# Altium PCB PCB2.PcbDoc
Units mm, origin at the board's own origin, x right, y up, seen from the top; angles counter-clockwise.
Board outline 124.87 x 54.51 mm, 2 copper layers (Top Layer, Bottom Layer); 28 components, 32 nets, 138 pads, 2 vias.
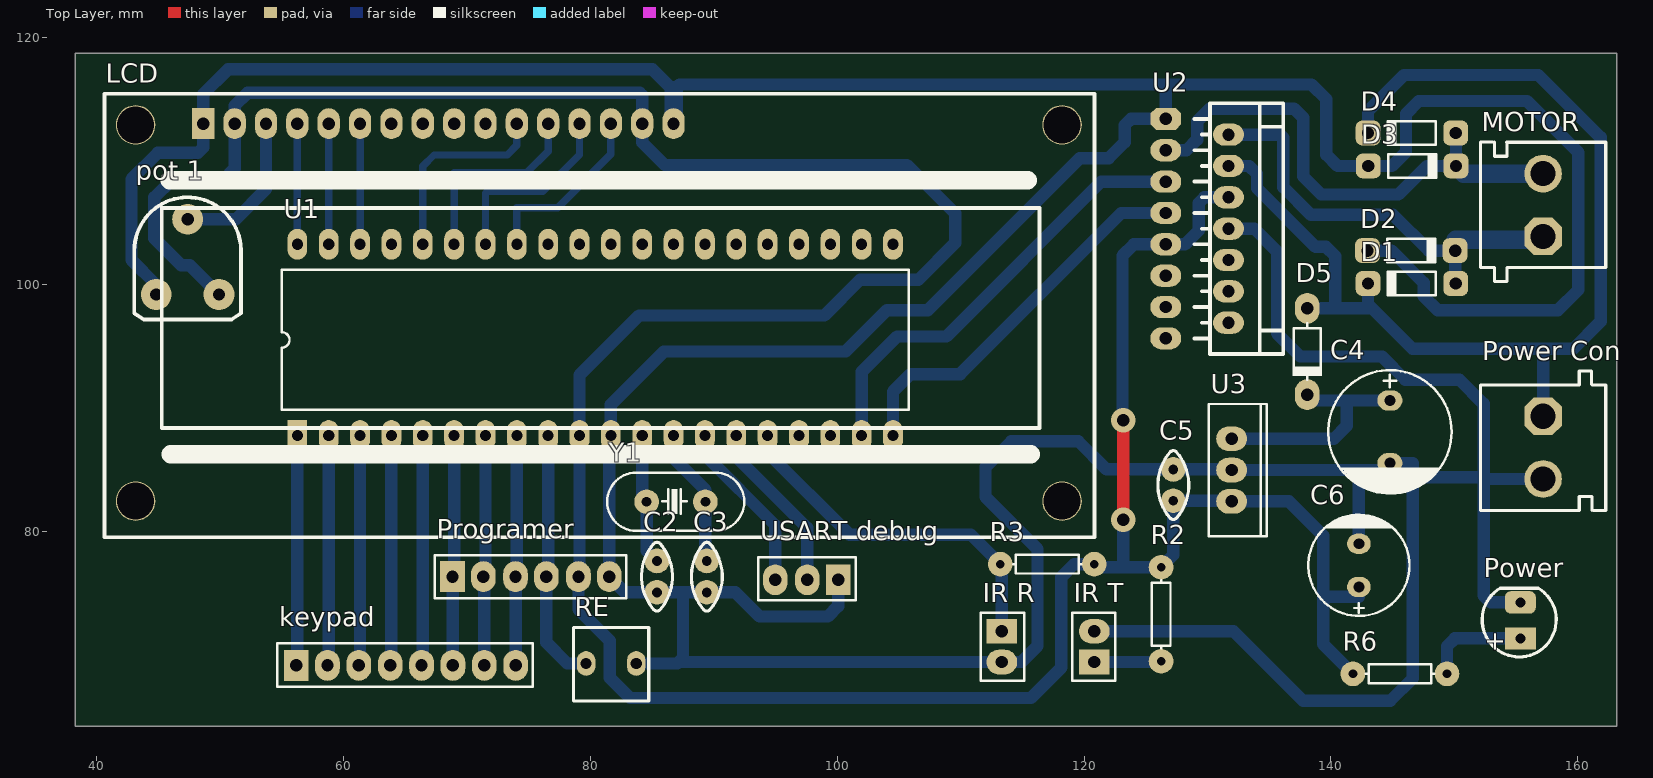
[diagram p0: Top Layer view]
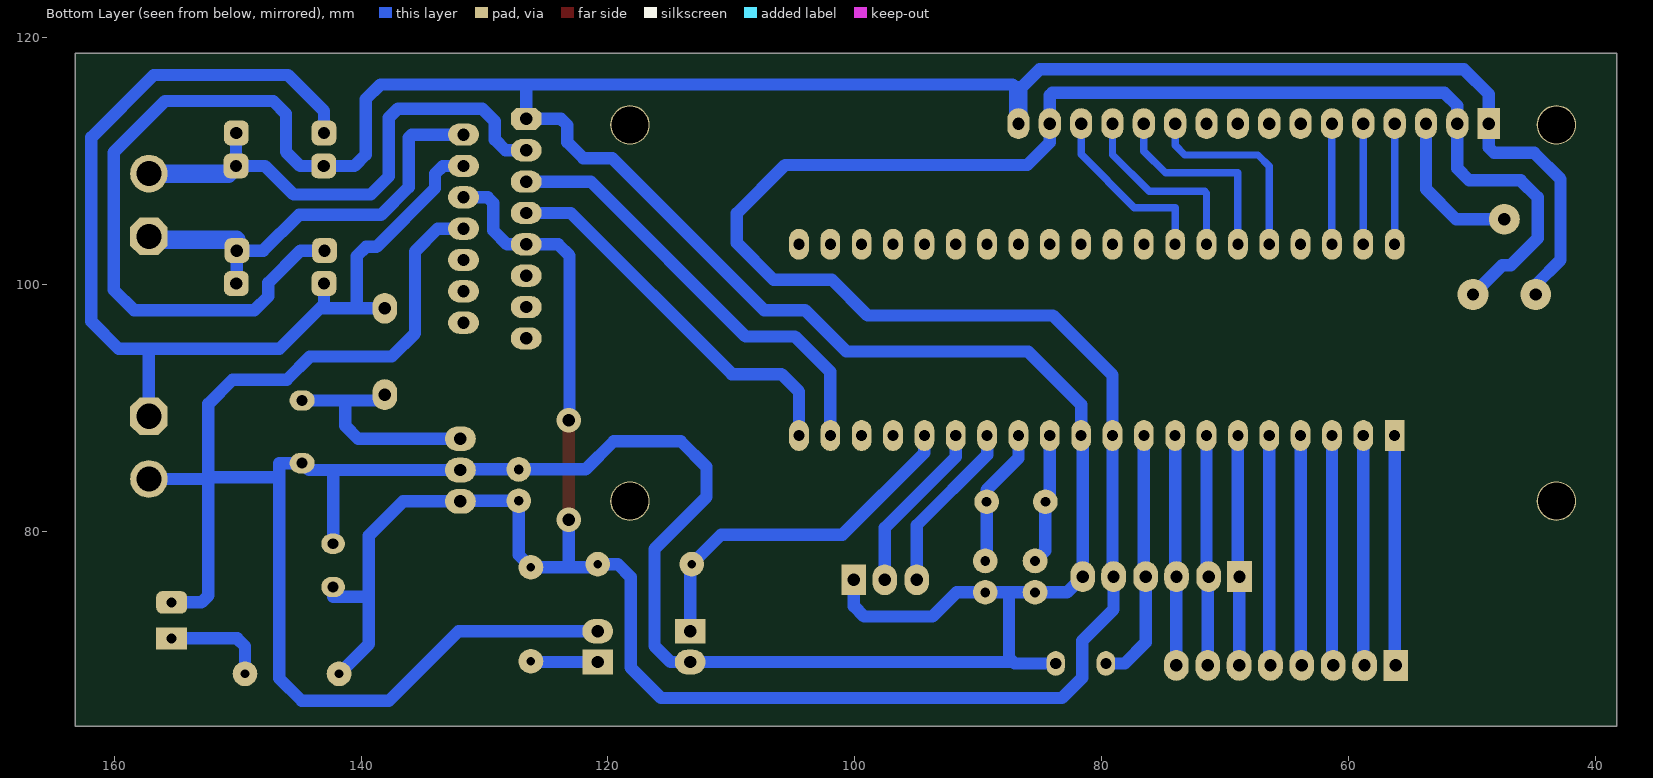
[diagram p1: Bottom Layer view, seen from below]

## Layer stack, top to bottom
Top Solder: solder mask 0.0102, Solder Resist, Dk 3.5
Top Layer: signal copper 0.0356
Dielectric 1: dielectric 0.32, FR-4, Dk 4.8
Bottom Layer: signal copper 0.0356
Bottom Solder: solder mask 0.0102, Solder Resist, Dk 3.5

## Board outline
38.278,64.211 163.144,64.211 163.144,118.72 38.278,118.72

## Design rules (kind name [scope] priority, off if disabled: settings)
Clearance [All] p1: gap=0.254
PolygonConnect [All] p1: connectstyle=Relief reliefconductorwidth=0.254 reliefentries=4 polygonreliefangle="90 Angle" airgapwidth=0.254
RoutingVias [All] p1: holewidth=1 width=2 viastyle="Through Hole" minholewidth=1 minwidth=2 maxholewidth=1 maxwidth=2
SolderMaskExpansion [All] p1: expansion=0.102
Width [All] p1: maxlimit=5 minlimit=0.6 preferedwidth=0.8
29 further rules are at their usual default settings.

## Components (designator, comment, footprint, x,y, rotation, side; value= is the part's Value field where it differs from the comment)
C2 "22PF" "Cap - 100nF" 85.395,76.327 r270 top
C3 "22PF" "Cap - 100nF" 89.433,76.327 r270 top
C4 "2200uF" "cap 04" 144.78,88.062 r90 top
C5 "100nF" "Cap - 100nF" 127.229,83.744 r90 top
C6 "470uF" "cap 03" 142.265,77.241 r270 top
D1 "1N4148" DO-35 146.558,100.076 r180 top
D2 "1N4148" DO-35 146.507,102.743 r0 top
D3 "1N4148" DO-35 146.583,109.601 r0 top
D4 "1N4148" DO-35 146.558,112.268 r180 top
D5 "?" Diode-1 138.074,98.069 r270 top
"IR R" "Pin Header" SIP2 113.335,71.907 r90 top
"IR T" "Pin Header" SIP2 120.828,69.407 r270 top
keypad "Pin Header" SIP8 56.159,69.139 r180 top
LCD "LCD 16*2" LCD2-16 48.641,113.03 r0 top
MOTOR "CON2 pin blue" My_CN2 152.095,101.371 r90 top
"pot 1" "5k" POT_1 44.831,99.187 r0 top
Power "LED 5mm" LED-1 155.346,72.72 r180 top
"Power Con" "CON2 pin blue" My_CN2 162.281,91.846 r270 top
Programer "Pin Header" SIP6 68.834,76.327 r180 top
R2 "330" AXIAL-0.3 126.238,77.089 r270 top
R3 "4.7K" AXIAL-0.3 120.828,77.343 r180 top
R6 "330" AXIAL-0.3 141.783,68.453 r0 top
RE "PB-2pin" PB-2pin 78.638,66.243 r0 top
U1 "ATmega16_PDIP" DIP40 56.261,87.757 r0 top
U2 "L298" L298 126.619,113.411 r270 top
U3 "7805" TO-220 131.953,84.963 r270 top
"USART debug" "Pin Header" SIP3 100.076,76.073 r0 top
Y1 "8mhz" XTAL 84.557,82.398 r0 top

## Footprints (in the part's own frame and the unit in brackets; to place one, negate y for a bottom-side part, rotate by r counter-clockwise, add the part's x,y. Pads: shape width x height; smd on the part's side, far side on the other; paste and mask are expansions set on the pad)
AXIAL-0.3 [mm]
  round 2 hole 0.7: 1(0,0) 2(7.62,0)
  silkscreen extent 1.04,-0.76 6.58,0.76
"cap 03" [mil]
  oval 65x75 hole 35: 1(68.9,0) 2(-68.9,0)
  silkscreen extent -161,-161 161,161, body extent -159,-159 157,158, height 473
"cap 04" [mil]
  oval 65x80 hole 35: 1(100,0) 2(-100,0)
  silkscreen extent -197,-197 197,197, body extent -198,-197 198,199, height 513
"Cap - 100nF" [mm]
  round 2 hole 0.8: 1(-1.27,0) 2(1.27,0)
  silkscreen extent -2.78,-1.25 2.79,1.25, body extent -2.92,-0.86 2.92,0.83, height 6.92
Diode-1 [mm]
  oval 2.5x2 hole 1 unplated: 1(0,0) 2(7,0)
  silkscreen extent 1.2,-1.2 5.8,1.2
DIP40 [mm]
  rect 1.6x2.5 hole 0.9: 1(0,0)
  oval 1.6x2.5 hole 0.9: 2(2.54,0) 3(5.08,0) 4(7.62,0) 5(10.16,0) 6(12.7,0) 7(15.24,0) 8(17.78,0) 9(20.32,0) 10(22.86,0) 11(25.4,0) 12(27.94,0) 13(30.48,0) 14(33.02,0) 15(35.56,0) 16(38.1,0) 17(40.64,0) 18(43.18,0) 19(45.72,0) 20(48.26,0) 21(48.26,15.5) 22(45.72,15.5) 23(43.18,15.5) 24(40.64,15.5) 25(38.1,15.5) 26(35.56,15.5) 27(33.02,15.5) 28(30.48,15.5) 29(27.94,15.5) 30(25.4,15.5) 31(22.86,15.5) 32(20.32,15.5) 33(17.78,15.5) 34(15.24,15.5) 35(12.7,15.5) 36(10.16,15.5) 37(7.62,15.5) 38(5.08,15.5) 39(2.54,15.5) 40(0,15.5)
  silkscreen extent -1.27,2.08 49.53,13.41
DO-35 [mm] "Diode, Axial; Body 3.8 x 1.9 mm (LxDia. max), Lead Dia. 0.53 mm (max)"
  rrect50% 2x2 hole 1: 1(-3.55,0) 2(3.55,0)
  silkscreen extent -1.95,-0.95 2.05,0.95, body extent -3.82,-0.87 3.82,0.87, height 1.89
L298 [mm]
  oct 1.8x2.5 hole 1: 1(0,0)
  oval 1.8x2.5 hole 1: 2(1.27,5.08) 3(2.54,0) 4(3.81,5.08) 5(5.08,0) 6(6.35,5.08) 7(7.62,0) 8(8.89,5.08) 9(10.16,0) 10(11.43,5.08) 11(12.7,0) 12(13.97,5.08) 13(15.24,0) 14(16.51,5.08) 15(17.78,0)
  silkscreen extent -1.27,2.31 19.05,9.53
LCD2-16 [mm]
  rect 1.8x2.5 hole 1: 1(0,0)
  oval 1.8x2.5 hole 1: 2(2.54,0) 3(5.08,0) 4(7.62,0) 5(10.16,0) 6(12.7,0) 7(15.24,0) 8(17.78,0) 9(20.32,0) 10(22.86,0) 11(25.4,0) 12(27.94,0) 13(30.48,0) 14(33.02,0) 15(35.56,0) 16(38.1,0)
  round 3.2 hole 3: ""(-5.486,-30.582) ""(-5.486,-0.102) ""(69.571,-30.582) ""(69.571,-0.102)
  silkscreen extent -8,-33.5 72.21,2.41
LED-1 [mm] "LED; 2 Leads"
  rect 2.5x1.8 hole 0.8: 1(0,1.397)
  rrect50% 2.5x1.8 hole 0.8: 2(0,-1.524)
  silkscreen extent -2.91,-2.67 3.09,2.9
My_CN2 [mil]
  oct 120x120 hole 80: 1(99.5,-200.5)
  round 120 hole 80: 2(299.5,-200.5)
  silkscreen extent -45,-400 400,0
PB-2pin [mm] "Switch"
  oval 1.5x2 hole 0.9: 1(1.016,3.048) 2(5.08,3.048)
  silkscreen extent 0,0 6.1,5.97
POT_1 [mm]
  round 2.5 hole 1: 1(0,0) 2(2.54,6.096) 3(5.08,0)
  silkscreen extent -1.78,-2.03 6.86,7.87
SIP2 [mm]
  rect 2x2.5 hole 1: 1(0,0)
  oval 2x2.5 hole 1: 2(-2.5,0)
  silkscreen extent -4,-1.8 1.5,1.7
SIP3 [mm]
  rect 2x2.5 hole 1: 1(0,0)
  oval 2x2.5 hole 1: 2(-2.5,0) 3(-5.1,0)
  silkscreen extent -6.47,-1.66 1.43,1.84
SIP6 [mm]
  rect 2x2.5 hole 1: 1(0,0)
  oval 2x2.5 hole 1: 2(-2.5,0) 3(-5.1,0) 4(-7.6,0) 5(-10.2,0) 6(-12.7,0)
  silkscreen extent -14.06,-1.73 1.45,1.77
SIP8 [mm]
  rect 2x2.5 hole 1: 1(0,0)
  oval 2x2.5 hole 1: 2(-2.541,0) 3(-5.082,0) 4(-7.623,0) 5(-10.164,0) 6(-12.705,0) 7(-15.246,0) 8(-17.787,0)
  silkscreen extent -19.19,-1.78 1.53,1.72
TO-220 [mm]
  oval 2x2.5 hole 1 unplated: 1(-2.54,0) 2(0,0) 3(2.54,0)
  silkscreen extent -5.35,-1.85 5.35,2.85
XTAL [mm]
  round 2 hole 0.8: 1(0,0) 2(4.76,0)
  silkscreen extent -3.19,-2.36 7.91,2.36, body extent -3.32,-2.38 8.03,2.42, height 13.06

## Part data
C2 C3 C5: library part Cap-Bipolar, "Bipolar Capacitor"
C4 C6: library part Cap-Polar, "Polar Capacitor"
D1 D2 D3 D4: library part "Diode 1N4148", "High Conductance Fast Diode"
D5: library part Diode, "Diode"
"IR R" "IR T": library part CON2
keypad: library part CON8
LCD: library part LCD-CH
MOTOR "Power Con": "Connector blue screw"
"pot 1": library part POT
Power: "Typical LED"
Programer: library part CON6
R2 R3 R6: library part Res, "Resistor"
RE: "Switch"
U1: "8-Bit AVR Microcontroller"
U3: "Reglator"
"USART debug": library part CON3
Y1: library part XTAL, "XTAL Crystal"

## Via types
v1: diameter 2, hole 1, Top Layer to Bottom Layer, 2 vias

## Nets (pads, with @x,y where several pads share a name; then routed paths per layer and width w, separated by ;. In a path a pad name is that pad's centre, name@x,y a point inside that pad or via, vN(x,y) a via of type N, cw(c..) or ccw(c..) an arc to the next point about the centre after c; other vN are vias at no path point)
FB: "IR R.1" R3.2 U1.16 | length 29.5
  Bottom Layer w1: U1.16 94.361,86.36 100.99,79.731 110.82,79.731 R3.2 113.335,77.216 113.335,71.907
GND: "IR R.2" "IR T.2" "pot 1.1" "Power Con.2" "USART debug.1" C2.2 C3.2 C4.2 C5.2 C6.2 D2.1 D3.1 LCD.1 LCD.16 Power.2 Programer.6 RE.2 U1.11 U2.1 U2.8 U3.2 | length 477.1
  Bottom Layer w1: 44.831,99.187 44.831,99.974 42.824,101.981 42.824,108.534 44.958,110.668 48.209,110.668 48.641,111.1 LCD.1 48.641,115.418 50.648,117.424 85.039,117.424 86.741,115.722 87.224,116.205 138.43,116.205 139.624,115.011 139.624,110.515 140.538,109.601 D3.1 144.932,109.601 146.075,110.744 146.075,113.817 147.117,114.859 155.88,114.859 160.045,110.693 160.045,99.568 158.394,97.917 148.641,97.917 147.523,99.035 147.523,100.127 144.907,102.743 D2.1 ; RE.2 87.046,69.291 87.162,69.407 ; 100.076,76.073 100.076,73.939 99.238,73.101 93.701,73.101 91.745,75.057 C3.2 87.503,75.057 ; 120.828,71.907 132.105,71.907 137.744,66.269 144.805,66.269 146.634,68.097 146.634,84.252 ; 126.949,116.205 126.619,115.875 U2.1 123.8,113.411 123.292,112.903 123.292,111.531 121.996,110.236 119.659,110.236 107.34,97.917 104.038,97.917 100.686,94.564 85.954,94.564 81.661,90.272 U1.11 81.534,87.63 Programer.6 82.804,75.057 C2.2 87.503,75.057 ; U2.8 133.782,104.521 135.636,102.667 135.636,96.037 137.516,94.158 144.145,94.158 146.025,92.278 150.419,92.278 152.375,90.322 152.375,84.391 ; U3.2@131.813,85.014 C5.2 121.818,85.014 119.532,87.3 114.097,87.3 112.014,85.217 112.014,82.779 116.23,78.562 116.23,70.714 114.924,69.407 113.335,69.407 87.162,69.407 ; U3.2 144.221,84.963 C4.2 146.634,85.522 146.634,84.252 ; C6.2@142.265,79.781 142.265,84.633 ; Power.2 152.933,74.244 152.375,74.803 152.375,84.391 ; 157.188,84.239 152.527,84.239 152.375,84.391 ; 87.162,69.407 87.503,69.748 87.503,75.057 ; 146.634,84.252 146.774,84.391 152.375,84.391
  Bottom Layer w1.5: LCD.16 86.741,115.722
M1: D1.1 D2.2 MOTOR.1 U2.2 | length 34
  Bottom Layer w1: U2.2 135.89,112.141 136.144,111.887 136.144,107.874 138.379,105.639 145.034,105.639 147.93,102.743 D2.2 D1.1@150.057,100.127
  Bottom Layer w1.5: D2.2@150.108,103.632 MOTOR.1@156.921,103.632
M2: D3.2 D4.1 MOTOR.2 U2.3 | length 42.3
  Bottom Layer w1: U2.3 128.295,110.871 129.159,111.735 129.159,113.208 130.195,114.244 137.013,114.244 137.744,113.513 137.744,108.763 139.217,107.29 145.466,107.29 147.777,109.601 D3.2 ; D4.1@150.133,112.243 D3.2 ; D3.2@150.756,108.979 D3.2
  Bottom Layer w1.5: D3.2@150.756,108.979 MOTOR.2
MISO: keypad.7 Programer.2 U1.7 | length 18.7
  Bottom Layer w1: keypad.7 71.405,76.256 Programer.2 71.501,76.494 U1.7
MOSI: keypad.6 Programer.1 U1.6 | length 18.7
  Bottom Layer w1: keypad.6 68.864,76.297 Programer.1 68.961,76.454 U1.6
NetC2_1: C2.1 U1.12 Y1.1 | length 10.7
  Bottom Layer w1: U1.12 84.201,82.753 Y1.1 84.557,78.435 C2.1
NetC3_1: C3.1 U1.13 Y1.2 | length 11.3
  Bottom Layer w1: U1.13 86.741,85.928 89.317,83.353 Y1.2 89.317,77.714 C3.1
NetC4_1: C4.1 D5.2 U3.1 | length 18.7
  Bottom Layer w1: U3.1 140.233,87.503 141.275,88.544 141.275,90.602 ; D5.2 138.542,90.602 141.275,90.602 ; C4.1 141.275,90.602
"NetIR T_1": "IR T.1" R2.2 | length 5.4
  Bottom Layer w1: 120.828,69.407 126.176,69.407 R2.2
Netkeypad_1: keypad.1 U1.1 | length 18.7
  Bottom Layer w1: keypad.1 56.261,69.24 U1.1
Netkeypad_2: keypad.2 U1.2 | length 18.7
  Bottom Layer w1: keypad.2 58.801,69.239 U1.2
Netkeypad_3: keypad.3 U1.3 | length 18.7
  Bottom Layer w1: keypad.3 61.341,69.238 U1.3
Netkeypad_4: keypad.4 U1.4 | length 18.7
  Bottom Layer w1: keypad.4 63.881,69.237 U1.4
Netkeypad_5: keypad.5 U1.5 | length 18.7
  Bottom Layer w1: keypad.5 66.421,69.236 U1.5
NetLCD_3: "pot 1.2" LCD.3 | length 12.7
  Bottom Layer w1: 47.371,105.283 51.283,105.283 53.721,107.721 LCD.3
NetLCD_4: LCD.4 U1.40 | length 9.8
  Bottom Layer w0.6: U1.40 LCD.4
NetLCD_5: LCD.5 U1.39 | length 9.8
  Bottom Layer w0.6: U1.39 LCD.5
NetLCD_6: LCD.6 U1.38 | length 9.8
  Bottom Layer w0.6: U1.38 LCD.6
NetLCD_11: LCD.11 U1.36 | length 16.4
  Bottom Layer w0.6: U1.36 66.421,109.576 67.335,110.49 73.254,110.49 74.041,111.277 LCD.11
NetLCD_12: LCD.12 U1.35 | length 16.4
  Bottom Layer w0.6: U1.35 68.961,109.042 74.828,109.042 76.581,110.795 LCD.12
NetLCD_13: LCD.13 U1.34 | length 15.6
  Bottom Layer w0.6: U1.34 71.501,107.391 71.653,107.544 76.149,107.544 79.121,110.515 LCD.13
NetLCD_14: LCD.14 U1.33 | length 14.9
  Bottom Layer w0.6: U1.33 74.041,106.223 77.343,106.223 81.661,110.541 LCD.14
NetPower_1: Power.1 R6.2 | length 8.4
  Bottom Layer w1: R6.2 149.403,70.688 150.038,71.323 Power.1
NetU1_19: U1.19 U2.5 | length 36.2
  Bottom Layer w1: U1.19 101.981,92.913 104.851,95.783 108.839,95.783 121.387,108.331 U2.5
NetU1_20: U1.20 U2.7 | length 31.7
  Bottom Layer w1: U1.20 104.521,91.313 105.943,92.735 109.957,92.735 123.012,105.791 U2.7
RST: Programer.4 RE.1 U1.9 | length 20.8
  Bottom Layer w1: U1.9 76.581,76.474 Programer.4 76.434,70.988 78.13,69.291 RE.1
RX: "USART debug.3" U1.14 | length 14
  Bottom Layer w1: U1.14 89.281,86.182 94.976,80.487 94.976,76.073
SCK: keypad.8 Programer.3 U1.8 | length 18.7
  Bottom Layer w1: keypad.8 73.946,76.315 Programer.3 74.041,76.434 U1.8
TX: "USART debug.2" U1.15 | length 14.1
  Bottom Layer w1: U1.15 91.821,86.03 97.576,80.275 97.576,76.073
VCC: "pot 1.3" C5.1 C6.1 LCD.2 LCD.15 Programer.5 R2.1 R3.1 R6.1 U1.10 U2.6 U2.9 U3.3 | length 276.3
  Top Layer w1: v1(123.165,80.924) v1(123.165,89.002)
  Bottom Layer w1: 49.911,99.187 47.549,101.549 46.863,101.549 44.679,103.734 44.679,107.061 46.05,108.433 50.216,108.433 51.181,109.398 LCD.2 51.181,114.478 52.222,115.519 83.998,115.519 84.201,115.316 LCD.15 84.201,111.506 86.03,109.677 105.639,109.677 109.55,105.766 109.55,103.353 106.578,100.381 101.854,100.381 98.958,97.485 83.947,97.485 79.121,92.659 U1.10 79.121,76.414 Programer.5 79.034,73.671 81.559,71.145 81.559,68.148 83.21,66.497 115.697,66.497 118.161,68.961 118.161,76.302 119.202,77.343 R3.1 121.082,77.089 123.215,77.089 ; v1(123.165,80.924) 123.165,77.14 123.215,77.089 ; v1(123.165,89.002) 123.114,89.002 123.114,102.337 124.028,103.251 U2.9 128.168,103.251 129.286,104.369 129.286,106.604 129.743,107.061 U2.6 ; U3.3@131.902,82.474 C5.1 127.229,78.08 R2.1 123.215,77.089 ; U3.3 136.601,82.423 139.37,79.654 139.37,70.866 R6.1 ; 139.548,74.701 C6.1@142.265,74.701
VS: "Power Con.1" D1.2 D4.2 D5.1 U2.4 | length 89.1
  Bottom Layer w1: U2.4 133.375,109.601 134.01,108.966 134.01,107.798 138.76,103.048 139.598,103.048 140.36,102.286 140.36,98.069 ; D5.1 140.36,98.069 ; D1.2 143.008,98.394 143.332,98.069 ; D4.2 143.008,114.052 145.923,116.967 156.794,116.967 161.849,111.912 161.849,97.003 159.626,94.78 157.188,94.78 157.188,89.319 ; 157.175,94.793 146.609,94.793 143.332,98.069 ; 140.36,98.069 143.332,98.069
pads on no net: LCD. LCD.7 LCD.8 LCD.9 LCD.10 U1.17 U1.18 U1.21 U1.22 U1.23 U1.24 U1.25 U1.26 U1.27 U1.28 U1.29 U1.30 U1.31 U1.32 U1.37 U2.10 U2.11 U2.12 U2.13 U2.14 U2.15

## Text inside footprints (layer, text, board x,y; h text height)
Power: Top Overlay "+" at 152.679,71.958 h1.52 r270